# EAGLE board 3EEPROM.v2 (EAGLE 5.07)
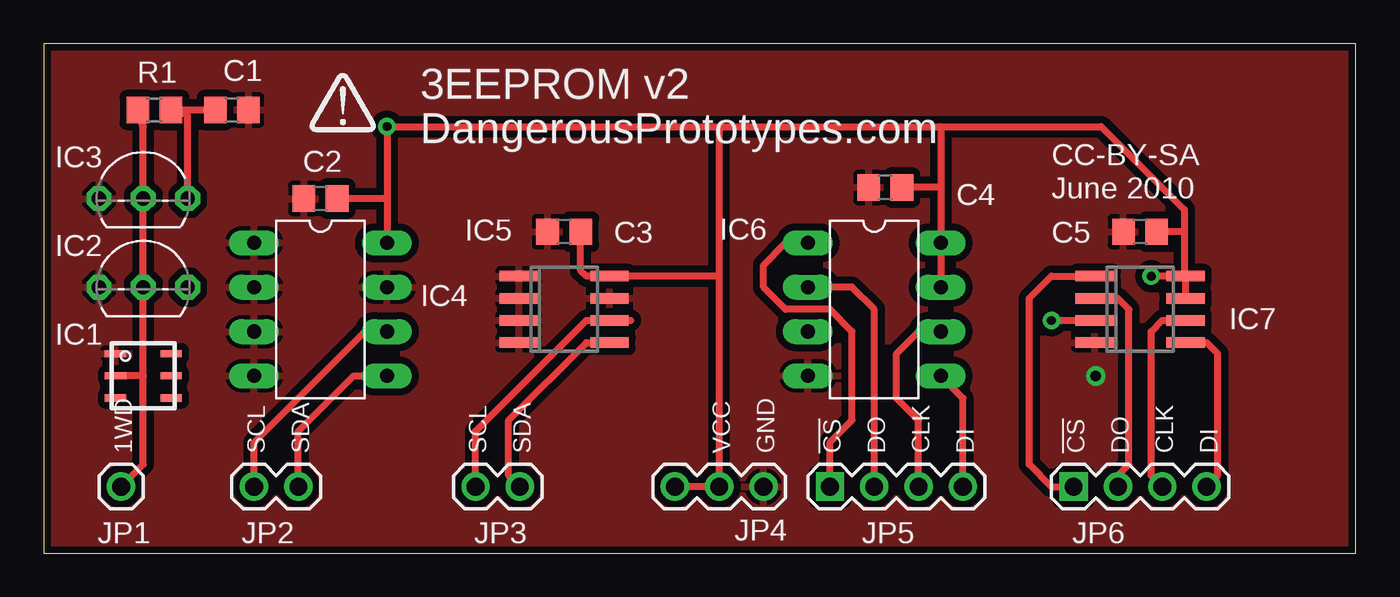
[diagram p0: board, top side]
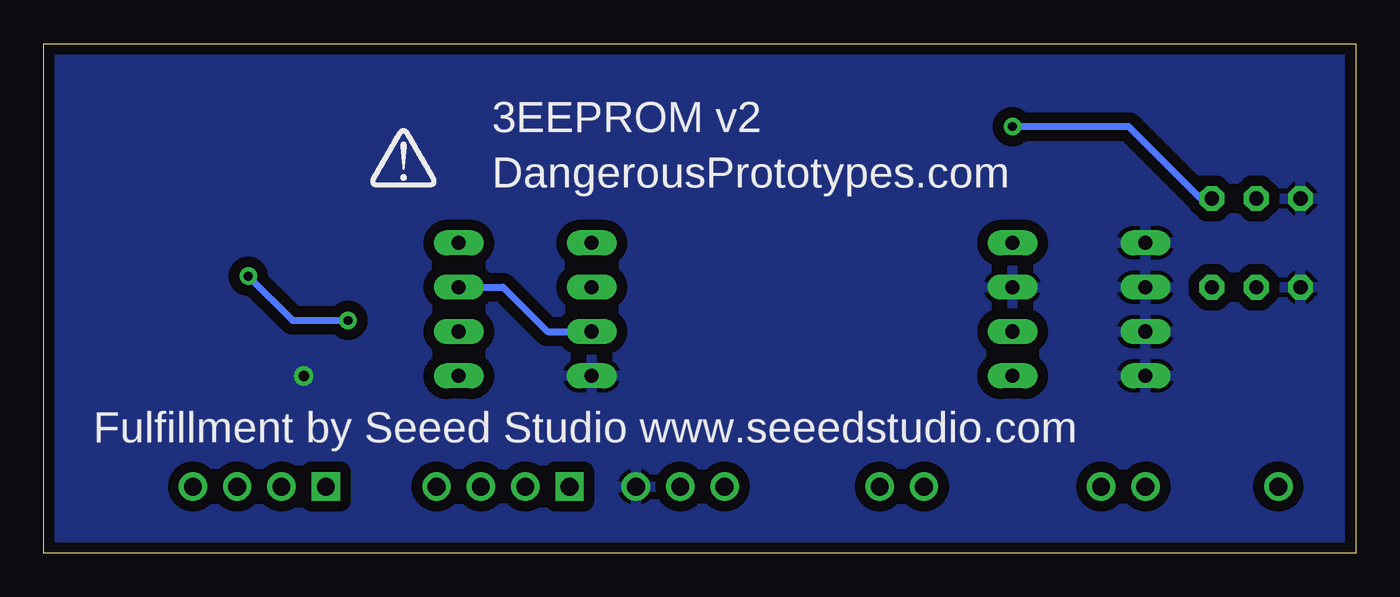
[diagram p1: board, bottom side, seen from below]

Size 75.23 x 29.2 mm. Coordinates in mm from the lower left corner, seen from the top.
Outline: 0,0 75.23,0 75.23,29.2 0,29.2 0,0
Copper layers (1*16): Top 0.035mm / dielectric 1.5mm / Bottom 0.035mm
Design rules "SparkFun": minimum track width 8mil, minimum drill 20mil, track to track 8mil, track to pad 8mil, pad to pad 8mil, via to via 8mil, smd to smd 8mil, copper to edge 10mil, drill to drill 8mil, minimum pad ring 12mil, minimum via ring 10mil, stop-mask expansion 4mil, vias tented up to drill 25mil, thermal gap 10mil

## Footprints (pad centres in the part's own frame; a part is rotated, then mirrored left to right if it is on the bottom)
C0805 = smd 1.3 x 1.5: 1 -0.95,0; 2 0.95,0
TSOC6 = smd 0.406 x 1.219: 1 -1.27,-1.6; 2 0,-1.6; 3 1.27,-1.6; 4 1.27,1.6; 5 0,1.6; 6 -1.27,1.6
TO92- = drill 0.813 octagon: 1 -2.54,0; 2 0,0; 3 2.54,0
DIL8 = drill 0.813 long: 1 -3.81,-3.81; 2 -1.27,-3.81; 3 1.27,-3.81; 4 3.81,-3.81; 5 3.81,3.81; 6 1.27,3.81; 7 -1.27,3.81; 8 -3.81,3.81
SO-08 = smd 0.6 x 2.2: 1 -1.905,-2.6; 2 -0.635,-2.6; 3 0.635,-2.6; 4 1.905,-2.6; 5 1.905,2.6; 6 0.635,2.6; 7 -0.635,2.6; 8 -1.905,2.6
1X01 = drill 1.016 round: 1 0,0
1X02 = drill 1.016 round: 1 0,0; 2 2.54,0
1X03 = drill 1.016 round: 1 0,0; 2 2.54,0; 3 5.08,0
1X04 = drill 1.016 square: 1 0,0 | drill 1.016 round: 2 2.54,0; 3 5.08,0; 4 7.62,0
R0805 = smd 1.3 x 1.5: 1 -0.95,0; 2 0.95,0

## Placement (x,y rotation side)
C1  0.1uF  [C0805]  10.79,25.4 0 top
C2  0.1uF  [C0805]  15.88,20.32 180 top
C3  0.1uF  [C0805]  29.85,18.41 180 top
C4  0.1uF  [C0805]  48.26,20.95 180 top
C5  0.1uF  [C0805]  62.86,18.41 180 top
IC1  DS2431P  [TSOC6]  5.71,10.16 270 top
IC2  DS2431  [TO92-]  5.71,15.24 0 top
IC3  DS1822  [TO92-]  5.71,20.32 0 top
IC4  24AAxx  [DIL8]  15.88,13.97 270 top
IC5  24AAxx  [SO-08]  29.85,13.97 270 top
IC6  25AAxx  [DIL8]  47.62,13.97 270 top
IC7  25AA080SN  [SO-08]  62.86,13.97 270 top
JP1  M01PTH  [1X01]  4.45,3.81 0 top
JP2  [1X02]  12.06,3.81 0 top
JP3  [1X02]  24.77,3.81 0 top
JP4  [1X03]  41.27,3.81 180 top
JP5  [1X04]  45.09,3.81 0 top
JP6  [1X04]  59.05,3.81 0 top
R1  1K8  [R0805]  6.35,25.4 0 top
U$1  [DP_LOGO]  17.15,24.77 0 top
U$2  [DP_LOGO]  54.61,21.59 0 bottom

## Library data of the parts
C1-C5 R1 = rcl
IC1-IC3 = 1wire
IC4-IC7 = microchip
JP1-JP6 = SparkFun
U$1 U$2 = dp_devices

## Nets
+5V: C1.1 C2.1 C3.1 C4.1 C5.1 IC3.3 IC4.8 IC5.8 IC6.3 IC6.7 IC6.8 IC7.3 IC7.7 IC7.8 JP4.2 JP4.3 R1.2
GND: C1.2 C2.2 C3.2 C4.2 C5.2 IC1.1 IC2.1 IC3.1 IC4.1 IC4.2 IC4.3 IC4.4 IC4.7 IC5.1 IC5.2 IC5.3 IC5.4 IC5.7 IC6.4 IC7.4 JP4.1
N$1: IC6.1 JP5.1
N$2: IC6.2 JP5.2
N$3: IC4.6 JP2.1
N$4: IC4.5 JP2.2
N$5: IC6.5 JP5.4
N$6: IC6.6 JP5.3
N$8: IC5.6 JP3.1
N$9: IC5.5 JP3.2
N$11: IC1.2 IC2.2 IC3.2 JP1.1 R1.1
N$12: IC7.1 JP6.1
N$13: IC7.2 JP6.2
N$14: IC7.5 JP6.4
N$15: IC7.6 JP6.3

## Tracks (layer width: path | path; a pad name or v marks a point on that pad's centre or on a via)
+5V  (via drill 0.51)
  Top 0.406: 38.73,15.88 JP4.2 JP4.3 | 38.73,24.45 v19.69,24.45 19.69,20.32 | 19.69,20.32 IC4.8 | IC6.8 IC6.7 IC6.8 | IC7.8 65.41,15.93 65.41,18.41 | 65.41,18.41 65.41,19.68 60.64,24.45 51.43,24.45 | 38.73,24.45 51.43,24.45 | 38.73,24.45 38.73,15.88 | IC3.3 8.26,25.09 R1.2 C1.1 | 19.69,20.32 C2.1 | C3.1 30.8,16.2 31.12,15.88 IC5.8 38.73,15.88 | 65.41,18.41 C5.1 | 51.43,24.45 51.43,20.95 | v57.78,13.34 IC7.3 | 51.43,20.95 C4.1 | 51.43,20.95 IC6.8 | IC7.8 v63.5,15.88 | IC7.8 IC7.7
  Bottom 0.406: v19.69,24.45 13.02,24.45 8.89,20.32 IC3.3 | v57.78,13.34 60.96,13.34 v63.5,15.88 | IC6.3 46.35,12.7 48.89,15.24 IC6.7
GND  (via drill 0.6)
  other vias: 60.32,10.16
  pour Top (isolate 0.406): -0.64,29.21 75.57,29.21 75.57,0 -0.64,0
  pour Bottom (isolate 0.61): -0.64,29.21 75.57,29.21 75.57,0 -0.64,0
N$1
  Top 0.406: IC6.1 42.54,17.78 41.27,16.51 41.27,15.24 42.54,13.97 45.09,13.97 46.35,12.7 46.35,7.62 45.09,6.35 JP5.1
N$2
  Top 0.406: IC6.2 46.35,15.24 47.62,13.97 JP5.2
N$3
  Top 0.406: IC4.6 18.42,12.7 12.06,6.35 JP2.1
N$4
  Top 0.406: IC4.5 17.78,10.16 14.61,6.99 JP2.2
N$5
  Top 0.406: IC6.5 52.7,8.89 JP5.4
N$6
  Top 0.406: IC6.6 50.16,12.7 48.89,11.43 48.89,8.89 50.16,7.62 JP5.3
N$8
  Top 0.406: 33.66,13.34 IC5.6 31.12,13.34 24.77,6.99 JP3.1
N$9
  Top 0.406: IC5.5 31.12,12.07 26.67,7.62 26.67,4.45 JP3.2
N$11
  Top 0.406: 5.71,10.16 5.71,5.08 JP1.1 | 5.71,10.16 IC2.2 IC3.2 5.71,24.45 R1.1 | 5.71,10.16 IC1.2
N$12
  Top 0.406: IC7.1 57.78,15.88 56.52,14.61 56.52,5.08 57.78,3.81 JP6.1
N$13
  Top 0.406: IC7.2 61.59,14.61 62.23,13.97 62.23,5.08 61.59,4.45 JP6.2
N$14
  Top 0.406: IC7.5 66.68,12.07 67.31,11.43 67.31,4.45 JP6.4
N$15
  Top 0.406: JP6.3 63.5,4.45 63.5,12.7 64.14,13.34 IC7.6

## Text on the board
tNames: 3EEPROM v2 | DangerousPrototypes.com | CC-BY-SA | June 2010 | 1WD | SCL | SDA | SCL | SDA | VCC | GND | !CS | DO | CLK | DI | !CS | DO | CLK | DI
bNames: 3EEPROM v2 | DangerousPrototypes.com | Fulfillment by Seeed Studio www.seeedstudio.com
Document: SCL | SDA | SCL | SDA | GND | !CS | MISO | CLK | MOSI | !CS | MISO | CLK | MOSI | 1Wire | +3-+5V | +3-+5V